# Altium PCB TG21_mach_nut_nhan _V1_ReV.PcbDoc (part 4 of 5)
Units mm, origin at the board's own origin, x right, y up, seen from the top; angles counter-clockwise.
Board outline 300 x 245 mm, 2 copper layers (Top Layer, Bottom Layer), stack 1.671 mm thick; 534 components, 407 nets, 1677 pads, 2608 vias.
Unrouted connection lines stored in the file: 3.
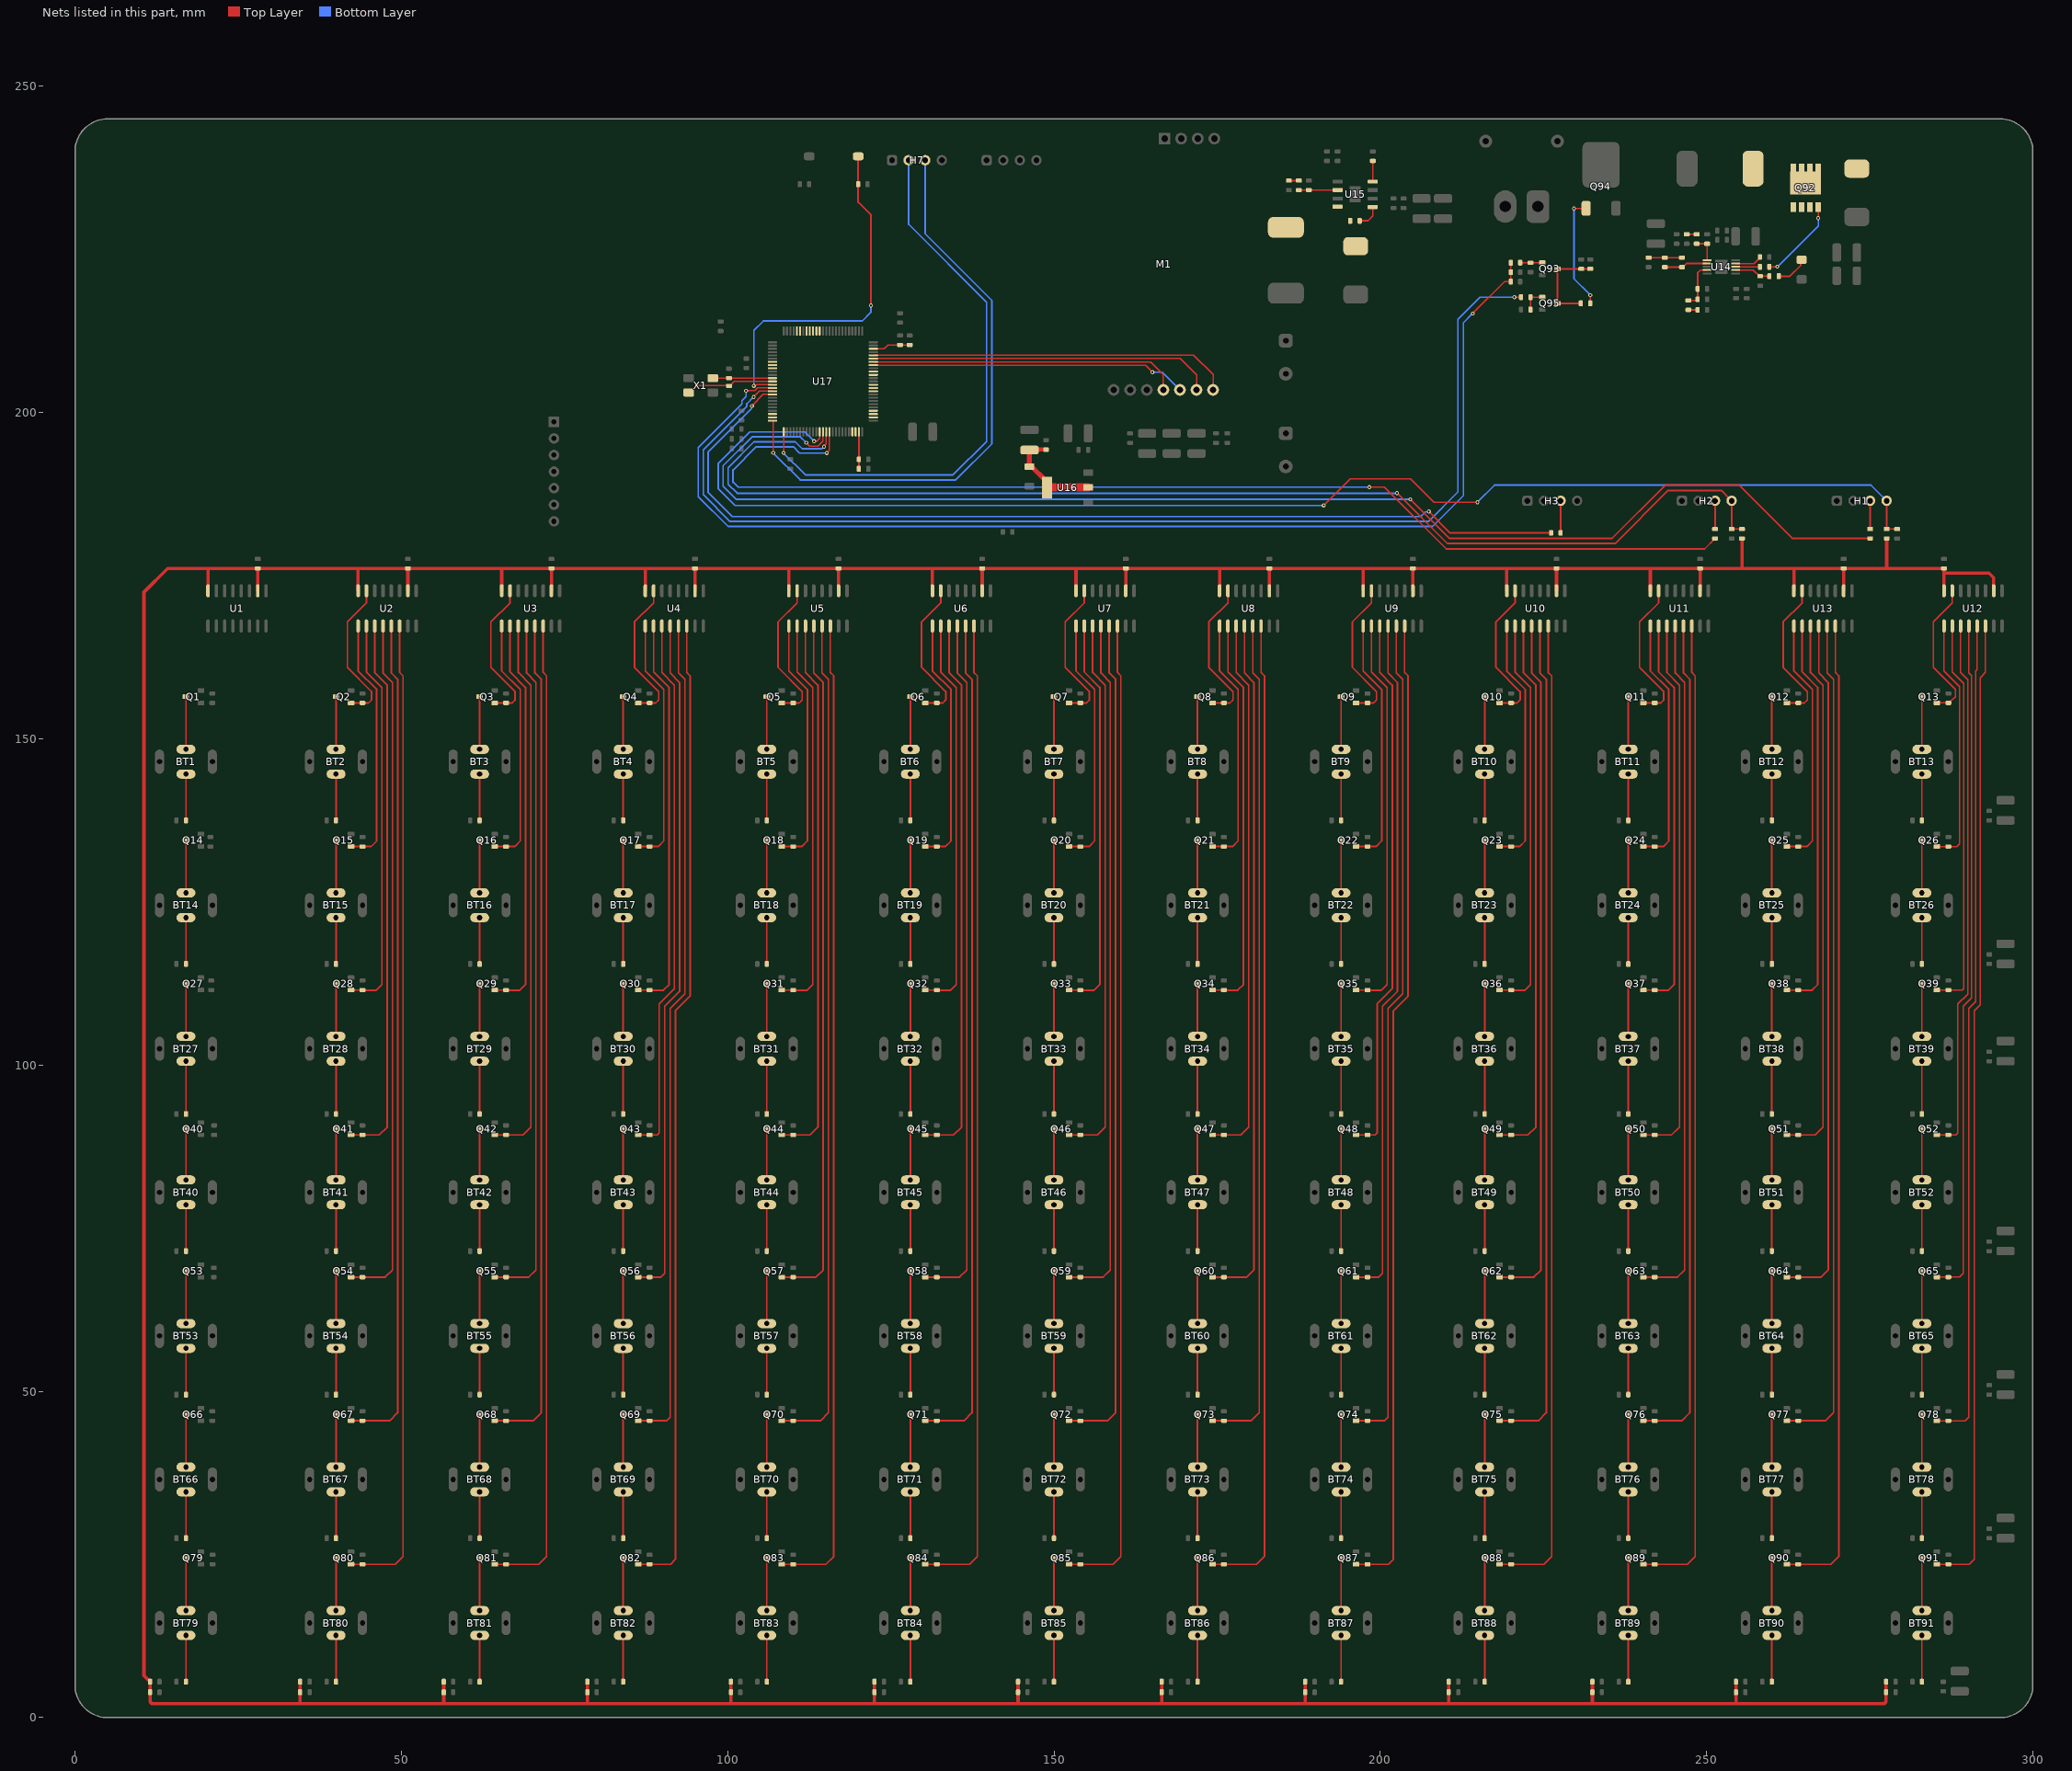
[diagram p4: the nets of this part, all layers, seen from the top]

## Via types
v1: diameter 0.6, hole 0.3, Top Layer to Bottom Layer, tented both sides, 2488 vias
v2: diameter 1.27, hole 0.711, Top Layer to Bottom Layer, tented both sides, 97 vias
v3: diameter 0.7, hole 0.3, Top Layer to Bottom Layer, tented both sides, 23 vias

## Nets (pads, with @x,y where several pads share a name; then routed paths per layer and width w, separated by ;. In a path a pad name is that pad's centre, name@x,y a point inside that pad or via, vN(x,y) a via of type N, cw(c..) or ccw(c..) an arc to the next point about the centre after c; other vN are vias at no path point) (continued)
L8: Q2.1 R15.2 U2.15 | length 24.6
  Top Layer w0.254: U2.15@44.655,172.699 44.655,170.846 41.727,167.919 41.727,160.953 45.436,157.244 45.436,155.949 44.987,155.5 R15.2@44.05,155.5 ; R15.2@44.05,155.5 Q2.1@42.3,155.5 R15.2@44.05,155.5
L9: Q15.1 R41.2 U2.1 | length 40.1
  Top Layer w0.254: U2.1@43.385,167.299 43.385,160.387 46.223,157.549 46.223,134.359 45.364,133.5 43.767,133.5 Q15.1@42.3,133.5 R41.2@44.05,133.5
L10: Q28.1 R67.2 U2.2 | length 62.8
  Top Layer w0.254: R67.2@44.05,111.5 Q28.1@42.3,111.5 43.869,111.5 43.895,111.473 46.172,111.473 47.036,112.337 47.036,157.879 44.655,160.26 U2.2@44.655,167.299
L11: Q41.1 R93.2 U2.3 | length 83.4
  Top Layer w0.254: Q41.1@42.3,89.3 R93.2@44.05,89.3 ; R93.2@44.326,89.3 46.63,89.3 47.849,90.518 47.849,158.235 45.925,160.159 U2.3@45.925,167.299
L12: Q54.1 R119.2 U2.4 | length 107.6
  Top Layer w0.254: R119.2@44.275,67.5 47.538,67.5 48.636,68.598 48.636,158.641 47.195,160.083 U2.4@47.195,167.299 ; Q54.1@42.3,67.5 R119.2@44.05,67.5 Q54.1@42.3,67.5
L13: Q67.1 R145.2 U2.5 | length 130.4
  Top Layer w0.254: U2.5@48.465,167.299 48.465,160.083 49.449,159.098 49.449,46.729 48.22,45.5 R145.2@44.05,45.5 ; R145.2@44.05,45.5 Q67.1@42.3,45.5 R145.2@44.05,45.5
L14: Q80.1 R171.2 U2.6 | length 153
  Top Layer w0.254: R171.2@44.072,23.5 49.055,23.5 50.262,24.707 50.262,159.657 49.735,160.184 U2.6@49.735,167.299 ; Q80.1@42.3,23.5 R171.2@44.05,23.5 Q80.1@42.3,23.5
L15: Q3.1 R16.2 U3.15 | length 24.6
  Top Layer w0.254: U3.15@66.655,172.699 66.655,170.846 63.727,167.919 63.727,160.953 67.436,157.244 67.436,155.949 66.987,155.5 R16.2@66.05,155.5 ; R16.2@66.05,155.5 Q3.1@64.3,155.5 R16.2@66.05,155.5
L16: Q16.1 R42.2 U3.1 | length 40.1
  Top Layer w0.254: U3.1@65.385,167.299 65.385,160.387 68.223,157.549 68.223,134.359 67.364,133.5 65.767,133.5 Q16.1@64.3,133.5 R42.2@66.05,133.5
L17: Q29.1 R68.2 U3.2 | length 62.8
  Top Layer w0.254: R68.2@66.05,111.5 Q29.1@64.3,111.5 65.869,111.5 65.895,111.473 68.172,111.473 69.036,112.337 69.036,157.879 66.655,160.26 U3.2@66.655,167.299
L18: Q42.1 R94.2 U3.3 | length 83.4
  Top Layer w0.254: Q42.1@64.3,89.3 R94.2@66.05,89.3 ; R94.2@66.326,89.3 68.63,89.3 69.849,90.518 69.849,158.235 67.925,160.159 U3.3@67.925,167.299
L19: Q55.1 R120.2 U3.4 | length 107.6
  Top Layer w0.254: R120.2@66.275,67.5 69.538,67.5 70.636,68.598 70.636,158.641 69.195,160.083 U3.4@69.195,167.299 ; Q55.1@64.3,67.5 R120.2@66.05,67.5 Q55.1@64.3,67.5
L20: Q68.1 R146.2 U3.5 | length 130.4
  Top Layer w0.254: U3.5@70.465,167.299 70.465,160.083 71.449,159.098 71.449,46.729 70.22,45.5 R146.2@66.05,45.5 ; R146.2@66.05,45.5 Q68.1@64.3,45.5 R146.2@66.05,45.5
L21: Q81.1 R172.2 U3.6 | length 153
  Top Layer w0.254: R172.2@66.072,23.5 71.055,23.5 72.262,24.707 72.262,159.657 71.735,160.184 U3.6@71.735,167.299 ; Q81.1@64.3,23.5 R172.2@66.05,23.5 Q81.1@64.3,23.5
L22: Q4.1 R17.2 U4.15 | length 24.6
  Top Layer w0.254: U4.15@88.655,172.699 88.655,170.846 85.727,167.919 85.727,160.953 89.436,157.244 89.436,155.949 88.987,155.5 R17.2@88.05,155.5 ; R17.2@88.05,155.5 Q4.1@86.3,155.5 R17.2@88.05,155.5
L23: Q17.1 R43.2 U4.1 | length 40.1
  Top Layer w0.254: U4.1@87.385,167.299 87.385,160.387 90.223,157.549 90.223,134.359 89.364,133.5 87.767,133.5 Q17.1@86.3,133.5 R43.2@88.05,133.5
L24: Q30.1 R69.2 U4.2 | length 62.8
  Top Layer w0.254: R69.2@88.05,111.5 Q30.1@86.3,111.5 87.869,111.5 87.895,111.473 90.172,111.473 91.036,112.337 91.036,157.879 88.655,160.26 U4.2@88.655,167.299
L25: Q43.1 R95.2 U4.3 | length 84.6
  Top Layer w0.254: U4.3@89.925,167.299 89.925,160.159 91.849,158.235 91.849,111.729 89.517,109.397 89.517,89.585 89.232,89.3 R95.2@88.05,89.3 ; R95.2@88.05,89.3 Q43.1@86.3,89.3 R95.2@88.05,89.3
L26: Q56.1 R121.2 U4.4 | length 104.8
  Top Layer w0.254: Q56.1@86.3,67.5 R121.2@88.05,67.5 ; R121.2@88.275,67.5 89.784,67.5 90.355,68.071 90.355,109.016 92.636,111.297 92.636,136.13 92.636,158.641 91.195,160.083 U4.4@91.195,167.299
L27: Q69.1 R147.2 U4.5 | length 127.7
  Top Layer w0.254: Q69.1@86.3,45.5 R147.2@88.05,45.5 90.644,45.5 91.193,46.049 91.193,108.685 93.449,110.941 93.449,131.006 93.449,159.098 92.465,160.083 U4.5@92.465,167.299
L28: Q82.1 R173.2 U4.6 | length 150.2
  Top Layer w0.254: Q82.1@86.3,23.5 R173.2@88.05,23.5 ; R173.2@88.072,23.5 91.25,23.5 92.006,24.256 92.006,108.33 94.262,110.586 94.262,125.92 94.262,159.657 93.735,160.184 U4.6@93.735,167.299
L29: Q5.1 R18.2 U5.15 | length 24.6
  Top Layer w0.254: U5.15@110.655,172.699 110.655,170.846 107.727,167.919 107.727,160.953 111.436,157.244 111.436,155.949 110.987,155.5 R18.2@110.05,155.5 ; R18.2@110.05,155.5 Q5.1@108.3,155.5 R18.2@110.05,155.5
L30: Q18.1 R44.2 U5.1 | length 40.1
  Top Layer w0.254: U5.1@109.385,167.299 109.385,160.387 112.223,157.549 112.223,134.359 111.364,133.5 109.767,133.5 Q18.1@108.3,133.5 R44.2@110.05,133.5
L31: Q31.1 R70.2 U5.2 | length 62.8
  Top Layer w0.254: R70.2@110.05,111.5 Q31.1@108.3,111.5 109.869,111.5 109.895,111.473 112.172,111.473 113.036,112.337 113.036,157.879 110.655,160.26 U5.2@110.655,167.299
L32: Q44.1 R96.2 U5.3 | length 83.4
  Top Layer w0.254: Q44.1@108.3,89.3 R96.2@110.05,89.3 ; R96.2@110.326,89.3 112.63,89.3 113.849,90.518 113.849,158.235 111.925,160.159 U5.3@111.925,167.299
L33: Q57.1 R122.2 U5.4 | length 107.6
  Top Layer w0.254: R122.2@110.275,67.5 113.538,67.5 114.636,68.598 114.636,158.641 113.195,160.083 U5.4@113.195,167.299 ; Q57.1@108.3,67.5 R122.2@110.05,67.5 Q57.1@108.3,67.5
L34: Q70.1 R148.2 U5.5 | length 130.4
  Top Layer w0.254: U5.5@114.465,167.299 114.465,160.083 115.449,159.098 115.449,46.729 114.22,45.5 R148.2@110.05,45.5 ; R148.2@110.05,45.5 Q70.1@108.3,45.5 R148.2@110.05,45.5
L35: Q83.1 R174.2 U5.6 | length 153
  Top Layer w0.254: R174.2@110.072,23.5 115.055,23.5 116.262,24.707 116.262,159.657 115.735,160.184 U5.6@115.735,167.299 ; Q83.1@108.3,23.5 R174.2@110.05,23.5 Q83.1@108.3,23.5
L36: Q6.1 R19.2 U6.15 | length 24.6
  Top Layer w0.254: U6.15@132.655,172.699 132.655,170.846 129.727,167.919 129.727,160.953 133.436,157.244 133.436,155.949 132.987,155.5 R19.2@132.05,155.5 ; R19.2@132.05,155.5 Q6.1@130.3,155.5 R19.2@132.05,155.5
L37: Q19.1 R45.2 U6.1 | length 40.1
  Top Layer w0.254: U6.1@131.385,167.299 131.385,160.387 134.223,157.549 134.223,134.359 133.364,133.5 131.767,133.5 Q19.1@130.3,133.5 R45.2@132.05,133.5
L38: Q32.1 R71.2 U6.2 | length 62.8
  Top Layer w0.254: R71.2@132.05,111.5 Q32.1@130.3,111.5 131.869,111.5 131.895,111.473 134.172,111.473 135.036,112.337 135.036,157.879 132.655,160.26 U6.2@132.655,167.299
L39: Q45.1 R97.2 U6.3 | length 83.4
  Top Layer w0.254: Q45.1@130.3,89.3 R97.2@132.05,89.3 ; R97.2@132.326,89.3 134.63,89.3 135.849,90.518 135.849,158.235 133.925,160.159 U6.3@133.925,167.299
L40: Q58.1 R123.2 U6.4 | length 107.6
  Top Layer w0.254: R123.2@132.275,67.5 135.538,67.5 136.636,68.598 136.636,158.641 135.195,160.083 U6.4@135.195,167.299 ; Q58.1@130.3,67.5 R123.2@132.05,67.5 Q58.1@130.3,67.5
L41: Q71.1 R149.2 U6.5 | length 130.4
  Top Layer w0.254: U6.5@136.465,167.299 136.465,160.083 137.449,159.098 137.449,46.729 136.22,45.5 R149.2@132.05,45.5 ; R149.2@132.05,45.5 Q71.1@130.3,45.5 R149.2@132.05,45.5
L42: Q84.1 R175.2 U6.6 | length 153
  Top Layer w0.254: R175.2@132.072,23.5 137.055,23.5 138.262,24.707 138.262,159.657 137.735,160.184 U6.6@137.735,167.299 ; Q84.1@130.3,23.5 R175.2@132.05,23.5 Q84.1@130.3,23.5
L43: Q7.1 R20.2 U7.15 | length 24.6
  Top Layer w0.254: U7.15@154.655,172.699 154.655,170.846 151.727,167.919 151.727,160.953 155.436,157.244 155.436,155.949 154.987,155.5 R20.2@154.05,155.5 ; R20.2@154.05,155.5 Q7.1@152.3,155.5 R20.2@154.05,155.5
L44: Q20.1 R46.2 U7.1 | length 40.1
  Top Layer w0.254: U7.1@153.385,167.299 153.385,160.387 156.223,157.549 156.223,134.359 155.364,133.5 153.767,133.5 Q20.1@152.3,133.5 R46.2@154.05,133.5
L45: Q33.1 R72.2 U7.2 | length 62.8
  Top Layer w0.254: R72.2@154.05,111.5 Q33.1@152.3,111.5 153.869,111.5 153.895,111.473 156.172,111.473 157.036,112.337 157.036,157.879 154.655,160.26 U7.2@154.655,167.299
L46: Q46.1 R98.2 U7.3 | length 83.4
  Top Layer w0.254: Q46.1@152.3,89.3 R98.2@154.05,89.3 ; R98.2@154.326,89.3 156.63,89.3 157.849,90.518 157.849,158.235 155.925,160.159 U7.3@155.925,167.299
L47: Q59.1 R124.2 U7.4 | length 107.6
  Top Layer w0.254: R124.2@154.275,67.5 157.538,67.5 158.636,68.598 158.636,158.641 157.195,160.083 U7.4@157.195,167.299 ; Q59.1@152.3,67.5 R124.2@154.05,67.5 Q59.1@152.3,67.5
L48: Q72.1 R150.2 U7.5 | length 130.4
  Top Layer w0.254: U7.5@158.465,167.299 158.465,160.083 159.449,159.098 159.449,46.729 158.22,45.5 R150.2@154.05,45.5 ; R150.2@154.05,45.5 Q72.1@152.3,45.5 R150.2@154.05,45.5
L49: Q85.1 R176.2 U7.6 | length 153
  Top Layer w0.254: R176.2@154.072,23.5 159.055,23.5 160.262,24.707 160.262,159.657 159.735,160.184 U7.6@159.735,167.299 ; Q85.1@152.3,23.5 R176.2@154.05,23.5 Q85.1@152.3,23.5
L50: Q8.1 R21.2 U8.15 | length 24.6
  Top Layer w0.254: U8.15@176.655,172.699 176.655,170.846 173.727,167.919 173.727,160.953 177.436,157.244 177.436,155.949 176.987,155.5 R21.2@176.05,155.5 ; R21.2@176.05,155.5 Q8.1@174.3,155.5 R21.2@176.05,155.5
L51: Q21.1 R47.2 U8.1 | length 40.1
  Top Layer w0.254: U8.1@175.385,167.299 175.385,160.387 178.223,157.549 178.223,134.359 177.364,133.5 175.767,133.5 Q21.1@174.3,133.5 R47.2@176.05,133.5
L52: Q34.1 R73.2 U8.2 | length 62.8
  Top Layer w0.254: R73.2@176.05,111.5 Q34.1@174.3,111.5 175.869,111.5 175.895,111.473 178.172,111.473 179.036,112.337 179.036,157.879 176.655,160.26 U8.2@176.655,167.299
L53: Q47.1 R99.2 U8.3 | length 83.4
  Top Layer w0.254: Q47.1@174.3,89.3 R99.2@176.05,89.3 ; R99.2@176.326,89.3 178.63,89.3 179.849,90.518 179.849,158.235 177.925,160.159 U8.3@177.925,167.299
L54: Q60.1 R125.2 U8.4 | length 107.6
  Top Layer w0.254: R125.2@176.275,67.5 179.538,67.5 180.636,68.598 180.636,158.641 179.195,160.083 U8.4@179.195,167.299 ; Q60.1@174.3,67.5 R125.2@176.05,67.5 Q60.1@174.3,67.5
L55: Q73.1 R151.2 U8.5 | length 130.4
  Top Layer w0.254: U8.5@180.465,167.299 180.465,160.083 181.449,159.098 181.449,46.729 180.22,45.5 R151.2@176.05,45.5 ; R151.2@176.05,45.5 Q73.1@174.3,45.5 R151.2@176.05,45.5
L56: Q86.1 R177.2 U8.6 | length 153
  Top Layer w0.254: R177.2@176.072,23.5 181.055,23.5 182.262,24.707 182.262,159.657 181.735,160.184 U8.6@181.735,167.299 ; Q86.1@174.3,23.5 R177.2@176.05,23.5 Q86.1@174.3,23.5
L57: Q9.1 R22.2 U9.15 | length 24.6
  Top Layer w0.254: U9.15@198.655,172.699 198.655,170.846 195.727,167.919 195.727,160.953 199.436,157.244 199.436,155.949 198.987,155.5 R22.2@198.05,155.5 ; R22.2@198.05,155.5 Q9.1@196.3,155.5 R22.2@198.05,155.5
L58: Q22.1 R48.2 U9.1 | length 40.1
  Top Layer w0.254: U9.1@197.385,167.299 197.385,160.387 200.223,157.549 200.223,134.359 199.364,133.5 197.767,133.5 Q22.1@196.3,133.5 R48.2@198.05,133.5
L59: Q35.1 R74.2 U9.2 | length 62.8
  Top Layer w0.254: R74.2@198.05,111.5 Q35.1@196.3,111.5 197.869,111.5 197.895,111.473 200.172,111.473 201.036,112.337 201.036,157.879 198.655,160.26 U9.2@198.655,167.299
L60: Q48.1 R100.2 U9.3 | length 84.6
  Top Layer w0.254: U9.3@199.925,167.299 199.925,160.159 201.849,158.235 201.849,111.729 199.517,109.397 199.517,89.585 199.232,89.3 R100.2@198.05,89.3 ; R100.2@198.05,89.3 Q48.1@196.3,89.3 R100.2@198.05,89.3
L61: Q61.1 R126.2 U9.4 | length 104.8
  Top Layer w0.254: Q61.1@196.3,67.5 R126.2@198.05,67.5 ; R126.2@198.275,67.5 199.784,67.5 200.355,68.071 200.355,109.016 202.636,111.297 202.636,136.13 202.636,158.641 201.195,160.083 U9.4@201.195,167.299
L62: Q74.1 R152.2 U9.5 | length 127.7
  Top Layer w0.254: Q74.1@196.3,45.5 R152.2@198.05,45.5 200.644,45.5 201.193,46.049 201.193,108.685 203.449,110.941 203.449,131.006 203.449,159.098 202.465,160.083 U9.5@202.465,167.299
L63: Q87.1 R178.2 U9.6 | length 150.2
  Top Layer w0.254: Q87.1@196.3,23.5 R178.2@198.05,23.5 ; R178.2@198.072,23.5 201.25,23.5 202.006,24.256 202.006,108.33 204.262,110.586 204.262,125.92 204.262,159.657 203.735,160.184 U9.6@203.735,167.299
L64: Q10.1 R23.2 U10.15 | length 24.6
  Top Layer w0.254: U10.15@220.655,172.699 220.655,170.846 217.727,167.919 217.727,160.953 221.436,157.244 221.436,155.949 220.987,155.5 R23.2@220.05,155.5 ; R23.2@220.05,155.5 Q10.1@218.3,155.5 R23.2@220.05,155.5
L65: Q23.1 R49.2 U10.1 | length 40.1
  Top Layer w0.254: U10.1@219.385,167.299 219.385,160.387 222.223,157.549 222.223,134.359 221.364,133.5 219.767,133.5 Q23.1@218.3,133.5 R49.2@220.05,133.5
L66: Q36.1 R75.2 U10.2 | length 62.8
  Top Layer w0.254: R75.2@220.05,111.5 Q36.1@218.3,111.5 219.869,111.5 219.895,111.473 222.172,111.473 223.036,112.337 223.036,157.879 220.655,160.26 U10.2@220.655,167.299
L67: Q49.1 R101.2 U10.3 | length 83.4
  Top Layer w0.254: Q49.1@218.3,89.3 R101.2@220.05,89.3 ; R101.2@220.326,89.3 222.63,89.3 223.849,90.518 223.849,158.235 221.925,160.159 U10.3@221.925,167.299
L68: Q62.1 R127.2 U10.4 | length 107.6
  Top Layer w0.254: R127.2@220.275,67.5 223.538,67.5 224.636,68.598 224.636,158.641 223.195,160.083 U10.4@223.195,167.299 ; Q62.1@218.3,67.5 R127.2@220.05,67.5 Q62.1@218.3,67.5
L69: Q75.1 R153.2 U10.5 | length 130.4
  Top Layer w0.254: U10.5@224.465,167.299 224.465,160.083 225.449,159.098 225.449,46.729 224.22,45.5 R153.2@220.05,45.5 ; R153.2@220.05,45.5 Q75.1@218.3,45.5 R153.2@220.05,45.5
L70: Q88.1 R179.2 U10.6 | length 153
  Top Layer w0.254: R179.2@220.072,23.5 225.055,23.5 226.262,24.707 226.262,159.657 225.735,160.184 U10.6@225.735,167.299 ; Q88.1@218.3,23.5 R179.2@220.05,23.5 Q88.1@218.3,23.5
L71: Q11.1 R24.2 U11.15 | length 24.6
  Top Layer w0.254: U11.15@242.655,172.699 242.655,170.846 239.727,167.919 239.727,160.953 243.436,157.244 243.436,155.949 242.987,155.5 R24.2@242.05,155.5 ; R24.2@242.05,155.5 Q11.1@240.3,155.5 R24.2@242.05,155.5
L72: Q24.1 R50.2 U11.1 | length 40.1
  Top Layer w0.254: U11.1@241.385,167.299 241.385,160.387 244.223,157.549 244.223,134.359 243.364,133.5 241.767,133.5 Q24.1@240.3,133.5 R50.2@242.05,133.5
L73: Q37.1 R76.2 U11.2 | length 62.8
  Top Layer w0.254: R76.2@242.05,111.5 Q37.1@240.3,111.5 241.869,111.5 241.895,111.473 244.172,111.473 245.036,112.337 245.036,157.879 242.655,160.26 U11.2@242.655,167.299
L74: Q50.1 R102.2 U11.3 | length 83.4
  Top Layer w0.254: Q50.1@240.3,89.3 R102.2@242.05,89.3 ; R102.2@242.326,89.3 244.63,89.3 245.849,90.518 245.849,158.235 243.925,160.159 U11.3@243.925,167.299
L75: Q63.1 R128.2 U11.4 | length 107.6
  Top Layer w0.254: R128.2@242.275,67.5 245.538,67.5 246.636,68.598 246.636,158.641 245.195,160.083 U11.4@245.195,167.299 ; Q63.1@240.3,67.5 R128.2@242.05,67.5 Q63.1@240.3,67.5
L76: Q76.1 R154.2 U11.5 | length 130.4
  Top Layer w0.254: U11.5@246.465,167.299 246.465,160.083 247.449,159.098 247.449,46.729 246.22,45.5 R154.2@242.05,45.5 ; R154.2@242.05,45.5 Q76.1@240.3,45.5 R154.2@242.05,45.5
L77: Q89.1 R180.2 U11.6 | length 153
  Top Layer w0.254: R180.2@242.072,23.5 247.055,23.5 248.262,24.707 248.262,159.657 247.735,160.184 U11.6@247.735,167.299 ; Q89.1@240.3,23.5 R180.2@242.05,23.5 Q89.1@240.3,23.5
L78: Q12.1 R25.2 U13.15 | length 24.6
  Top Layer w0.254: U13.15@264.655,172.699 264.655,170.846 261.727,167.919 261.727,160.953 265.436,157.244 265.436,155.949 264.987,155.5 R25.2@264.05,155.5 ; R25.2@264.05,155.5 Q12.1@262.3,155.5 R25.2@264.05,155.5
L79: Q25.1 R51.2 U13.1 | length 40.1
  Top Layer w0.254: U13.1@263.385,167.299 263.385,160.387 266.223,157.549 266.223,134.359 265.364,133.5 263.767,133.5 Q25.1@262.3,133.5 R51.2@264.05,133.5
L80: Q38.1 R77.2 U13.2 | length 62.8
  Top Layer w0.254: R77.2@264.05,111.5 Q38.1@262.3,111.5 263.869,111.5 263.895,111.473 266.172,111.473 267.036,112.337 267.036,157.879 264.655,160.26 U13.2@264.655,167.299
L81: Q51.1 R103.2 U13.3 | length 83.4
  Top Layer w0.254: Q51.1@262.3,89.3 R103.2@264.05,89.3 ; R103.2@264.326,89.3 266.63,89.3 267.849,90.518 267.849,158.235 265.925,160.159 U13.3@265.925,167.299
L82: Q64.1 R129.2 U13.4 | length 107.6
  Top Layer w0.254: R129.2@264.275,67.5 267.538,67.5 268.636,68.598 268.636,158.641 267.195,160.083 U13.4@267.195,167.299 ; Q64.1@262.3,67.5 R129.2@264.05,67.5 Q64.1@262.3,67.5
L83: Q77.1 R155.2 U13.5 | length 130.4
  Top Layer w0.254: U13.5@268.465,167.299 268.465,160.083 269.449,159.098 269.449,46.729 268.22,45.5 R155.2@264.05,45.5 ; R155.2@264.05,45.5 Q77.1@262.3,45.5 R155.2@264.05,45.5
L84: Q90.1 R181.2 U13.6 | length 153
  Top Layer w0.254: R181.2@264.072,23.5 269.055,23.5 270.262,24.707 270.262,159.657 269.735,160.184 U13.6@269.735,167.299 ; Q90.1@262.3,23.5 R181.2@264.05,23.5 Q90.1@262.3,23.5
L85: Q13.1 R26.2 U12.15 | length 22.1
  Top Layer w0.203: Q13.1@285.3,155.5 287.156,155.5 287.373,155.717 288.11,156.454 288.11,157.57 284.727,160.953 284.727,167.919 287.655,170.846 U12.15@287.655,172.699
L86: Q26.1 R52.2 U12.1 | length 39.5
  Top Layer w0.203: U12.1@286.385,167.299 286.385,160.387 288.771,158.001 288.771,133.906 288.364,133.5 R52.2@287.05,133.5 Q26.1@285.3,133.5 R52.2@286.767,133.5
L87: Q39.1 R78.2 U12.2 | length 62.1
  Top Layer w0.203: R78.2@286.869,111.5 Q39.1@285.3,111.5 R78.2@287.05,111.5 ; R78.2@287.05,111.473 289.172,111.473 289.406,111.707 289.406,158.509 287.655,160.26 U12.2@287.655,167.299
L88: Q52.1 R104.2 U12.3 | length 82.1
  Top Layer w0.203: Q52.1@285.3,89.3 R104.2@287.05,89.3 288.232,89.3 288.517,89.585 288.517,109.397 290.015,110.895 290.015,159.068 288.925,160.159 U12.3@288.925,167.299
L89: Q65.1 R130.2 U12.4 | length 104
  Top Layer w0.203: Q65.1@285.3,67.5 R130.2@287.05,67.5 ; R130.2@287.275,67.5 288.784,67.5 289.355,68.071 289.355,109.016 290.625,110.286 290.625,159.652 290.195,160.083 U12.4@290.195,167.299
L90: Q78.1 R156.2 U12.5 | length 126.9
  Top Layer w0.203: Q78.1@285.3,45.5 R156.2@287.05,45.5 289.644,45.5 290.193,46.049 290.193,108.685 291.26,109.752 291.26,160.422 291.465,160.627 U12.5@291.465,167.299
L91: Q91.1 R182.2 U12.6 | length 149.8
  Top Layer w0.203: Q91.1@285.3,23.5 R182.2@287.05,23.5 ; R182.2@287.072,23.5 290.25,23.5 291.006,24.256 291.006,108.33 291.92,109.244 291.92,159.37 292.735,160.184 U12.6@292.735,167.299
LED_PW: R200.1 U17.17 | length 152.3
  Top Layer w0.178: v1(103.734,201.016) 103.734,201.041 105.467,202.775 U17.17@106.88,202.775
  Top Layer w0.254: v1(207.442,184.846) 210.728,181.559 R200.1@226.185,181.559
  Bottom Layer w0.254: v1(103.734,201.016) 103.667,200.949 103.667,200.629 97.028,193.99 97.028,187.753 100.545,184.236 100.707,184.074 206.208,184.074 206.37,184.236 206.914,184.78 207.376,184.78 v1(207.442,184.846)
LED_SET: R197.1 U17.38 | length 208.4
  Top Layer w0.178: v1(112.065,195.377) 112.573,194.869 113.843,194.869 114.605,195.631 U17.38@114.605,197.05
  Top Layer w0.254: v1(204.597,186.715) 210.584,180.728 235.541,180.728 243.688,188.874 254.991,188.874 263.164,180.701 R197.1@275.063,180.701
  Bottom Layer w0.254: v1(112.065,195.377) 111.165,196.277 103.734,196.277 99.314,191.857 99.314,188.7 101.299,186.715 v1(204.597,186.715)
LED_STOP: R199.1 U17.40 | length 176.9
  Top Layer w0.178: v1(115.189,193.802) 115.214,193.802 115.605,194.192 U17.40@115.605,197.05
  Top Layer w0.254: v1(198.323,188.565) 200.639,188.565 210.109,179.095 249.702,179.095 R199.1@251.308,180.701
  Bottom Layer w0.254: v1(115.189,193.802) 111.013,193.802 110.062,194.753 104.379,194.753 100.838,191.211 100.838,189.334 101.608,188.565 v1(198.323,188.565)
M0.1: M1.1 U17.71 | length 55.6
  Top Layer w0.178: U17.71@122.33,208.775 171.412,208.775 174.384,205.803 M1.1@174.384,203.486
M0.2: U17.53
M1.1: M1.2 U17.70 | length 52.8
  Top Layer w0.178: U17.70@122.33,208.275 169.322,208.275 171.844,205.752 M1.2@171.844,203.486
M1.2: U17.52
MCU_BT: R215.2 R216.2 R217.2 U17.15 | length 183.7
  Top Layer w0.178: v1(102.819,203.352) 104.186,203.352 104.608,203.775 U17.15@106.88,203.775
  Top Layer w0.254: v1(214.173,215.189) 219.049,220.065 R215.2@219.989,220.065 ; R215.2@219.989,220.171 R217.2@219.989,221.519 R216.2@219.989,222.969
  Bottom Layer w0.254: v1(102.819,203.352) 102.819,202.474 102.184,201.839 102.184,201.301 95.504,194.621 95.504,187.122 100.076,182.55 208.026,182.55 212.75,187.274 212.75,213.766 v1(214.173,215.189)
MCU_EN: R221.2 U17.16 | length 178.2
  Top Layer w0.178: v1(103.974,202.387) 104.862,203.275 U17.16@106.88,203.275
  Top Layer w0.254: v1(220.548,217.678) 220.553,217.683 221.57,217.683 R221.2@221.575,217.688
  Bottom Layer w0.254: v1(103.974,202.387) 102.946,201.359 102.946,200.986 96.266,194.305 96.266,187.437 100.392,183.312 207.366,183.312 211.887,187.833 211.887,214.3 215.265,217.678 v1(220.548,217.678)
NetBT1_3: BT1.3 R1.2 | length 7.1
  Top Layer w0.254: R1.2@17,137.5 BT1.3@17,144.6
NetBT1_4: BT1.4 Q1.3 | length 8.1
  Top Layer w0.254: BT1.4@17,148.4 Q1.3@17,156.45
NetBT2_3: BT2.3 R2.2 | length 7.1
  Top Layer w0.254: R2.2@40,137.5 BT2.3@40,144.6
NetBT2_4: BT2.4 Q2.3 | length 8.1
  Top Layer w0.254: BT2.4@40,148.4 Q2.3@40,156.45
NetBT3_3: BT3.3 R3.2 | length 7.1
  Top Layer w0.254: R3.2@62,137.5 BT3.3@62,144.6
NetBT3_4: BT3.4 Q3.3 | length 8.1
  Top Layer w0.254: BT3.4@62,148.4 Q3.3@62,156.45
NetBT4_3: BT4.3 R4.2 | length 7.1
  Top Layer w0.254: R4.2@84,137.5 BT4.3@84,144.6
NetBT4_4: BT4.4 Q4.3 | length 8.1
  Top Layer w0.254: BT4.4@84,148.4 Q4.3@84,156.45
NetBT5_3: BT5.3 R5.2 | length 7.1
  Top Layer w0.254: R5.2@106,137.5 BT5.3@106,144.6
NetBT5_4: BT5.4 Q5.3 | length 8.1
  Top Layer w0.254: BT5.4@106,148.4 Q5.3@106,156.45
NetBT6_3: BT6.3 R6.2 | length 7.1
  Top Layer w0.254: R6.2@128,137.5 BT6.3@128,144.6
NetBT6_4: BT6.4 Q6.3 | length 8.1
  Top Layer w0.254: BT6.4@128,148.4 Q6.3@128,156.45
NetBT7_3: BT7.3 R7.2 | length 7.1
  Top Layer w0.254: R7.2@150,137.5 BT7.3@150,144.6
NetBT7_4: BT7.4 Q7.3 | length 8.1
  Top Layer w0.254: BT7.4@150,148.4 Q7.3@150,156.45
NetBT8_3: BT8.3 R8.2 | length 7.1
  Top Layer w0.254: R8.2@172,137.5 BT8.3@172,144.6
NetBT8_4: BT8.4 Q8.3 | length 8.1
  Top Layer w0.254: BT8.4@172,148.4 Q8.3@172,156.45
NetBT9_3: BT9.3 R9.2 | length 7.1
  Top Layer w0.254: R9.2@194,137.5 BT9.3@194,144.6
NetBT9_4: BT9.4 Q9.3 | length 8.1
  Top Layer w0.254: BT9.4@194,148.4 Q9.3@194,156.45
NetBT10_3: BT10.3 R10.2 | length 7.1
  Top Layer w0.254: R10.2@216,137.5 BT10.3@216,144.6
NetBT10_4: BT10.4 Q10.3 | length 8.1
  Top Layer w0.254: BT10.4@216,148.4 Q10.3@216,156.45
NetBT11_3: BT11.3 R11.2 | length 7.1
  Top Layer w0.254: R11.2@238,137.5 BT11.3@238,144.6
NetBT11_4: BT11.4 Q11.3 | length 8.1
  Top Layer w0.254: BT11.4@238,148.4 Q11.3@238,156.45
NetBT12_3: BT12.3 R12.2 | length 7.1
  Top Layer w0.254: R12.2@260,137.5 BT12.3@260,144.6
NetBT12_4: BT12.4 Q12.3 | length 8.1
  Top Layer w0.254: BT12.4@260,148.4 Q12.3@260,156.45
NetBT13_3: BT13.3 R13.2 | length 7.1
  Top Layer w0.254: R13.2@283,137.5 BT13.3@283,144.6
NetBT13_4: BT13.4 Q13.3 | length 8.1
  Top Layer w0.254: BT13.4@283,148.4 Q13.3@283,156.45
NetBT14_3: BT14.3 R27.2 | length 7.1
  Top Layer w0.254: R27.2@17,115.5 BT14.3@17,122.6
NetBT14_4: BT14.4 Q14.3 | length 8.1
  Top Layer w0.254: BT14.4@17,126.4 Q14.3@17,134.45
NetBT15_3: BT15.3 R28.2 | length 7.1
  Top Layer w0.254: R28.2@40,115.5 BT15.3@40,122.6
NetBT15_4: BT15.4 Q15.3 | length 8.1
  Top Layer w0.254: BT15.4@40,126.4 Q15.3@40,134.45
NetBT16_3: BT16.3 R29.2 | length 7.1
  Top Layer w0.254: R29.2@62,115.5 BT16.3@62,122.6
NetBT16_4: BT16.4 Q16.3 | length 8.1
  Top Layer w0.254: BT16.4@62,126.4 Q16.3@62,134.45
NetBT17_3: BT17.3 R30.2 | length 7.1
  Top Layer w0.254: R30.2@84,115.5 BT17.3@84,122.6
NetBT17_4: BT17.4 Q17.3 | length 8.1
  Top Layer w0.254: BT17.4@84,126.4 Q17.3@84,134.45
NetBT18_3: BT18.3 R31.2 | length 7.1
  Top Layer w0.254: R31.2@106,115.5 BT18.3@106,122.6
NetBT18_4: BT18.4 Q18.3 | length 8.1
  Top Layer w0.254: BT18.4@106,126.4 Q18.3@106,134.45
NetBT19_3: BT19.3 R32.2 | length 7.1
  Top Layer w0.254: R32.2@128,115.5 BT19.3@128,122.6
NetBT19_4: BT19.4 Q19.3 | length 8.1
  Top Layer w0.254: BT19.4@128,126.4 Q19.3@128,134.45
NetBT20_3: BT20.3 R33.2 | length 7.1
  Top Layer w0.254: R33.2@150,115.5 BT20.3@150,122.6
NetBT20_4: BT20.4 Q20.3 | length 8.1
  Top Layer w0.254: BT20.4@150,126.4 Q20.3@150,134.45
NetBT21_3: BT21.3 R34.2 | length 7.1
  Top Layer w0.254: R34.2@172,115.5 BT21.3@172,122.6
NetBT21_4: BT21.4 Q21.3 | length 8.1
  Top Layer w0.254: BT21.4@172,126.4 Q21.3@172,134.45
NetBT22_3: BT22.3 R35.2 | length 7.1
  Top Layer w0.254: R35.2@194,115.5 BT22.3@194,122.6
NetBT22_4: BT22.4 Q22.3 | length 8.1
  Top Layer w0.254: BT22.4@194,126.4 Q22.3@194,134.45
NetBT23_3: BT23.3 R36.2 | length 7.1
  Top Layer w0.254: R36.2@216,115.5 BT23.3@216,122.6
NetBT23_4: BT23.4 Q23.3 | length 8.1
  Top Layer w0.254: BT23.4@216,126.4 Q23.3@216,134.45
NetBT24_3: BT24.3 R37.2 | length 7.1
  Top Layer w0.254: R37.2@238,115.5 BT24.3@238,122.6
NetBT24_4: BT24.4 Q24.3 | length 8.1
  Top Layer w0.254: BT24.4@238,126.4 Q24.3@238,134.45
NetBT25_3: BT25.3 R38.2 | length 7.1
  Top Layer w0.254: R38.2@260,115.5 BT25.3@260,122.6
NetBT25_4: BT25.4 Q25.3 | length 8.1
  Top Layer w0.254: BT25.4@260,126.4 Q25.3@260,134.45
NetBT26_3: BT26.3 R39.2 | length 7.1
  Top Layer w0.254: R39.2@283,115.5 BT26.3@283,122.6
NetBT26_4: BT26.4 Q26.3 | length 8.1
  Top Layer w0.254: BT26.4@283,126.4 Q26.3@283,134.45
NetBT27_3: BT27.3 R53.2 | length 8.1
  Top Layer w0.254: R53.2@17,92.503 BT27.3@17,100.6
NetBT27_4: BT27.4 Q27.3 | length 8.1
  Top Layer w0.254: BT27.4@17,104.4 Q27.3@17,112.45
NetBT28_3: BT28.3 R54.2 | length 8.1
  Top Layer w0.254: R54.2@40,92.503 BT28.3@40,100.6
NetBT28_4: BT28.4 Q28.3 | length 8.1
  Top Layer w0.254: BT28.4@40,104.4 Q28.3@40,112.45
NetBT29_3: BT29.3 R55.2 | length 8.1
  Top Layer w0.254: R55.2@62,92.503 BT29.3@62,100.6
NetBT29_4: BT29.4 Q29.3 | length 8.1
  Top Layer w0.254: BT29.4@62,104.4 Q29.3@62,112.45
NetBT30_3: BT30.3 R56.2 | length 8.1
  Top Layer w0.254: R56.2@84,92.503 BT30.3@84,100.6
NetBT30_4: BT30.4 Q30.3 | length 8.1
  Top Layer w0.254: BT30.4@84,104.4 Q30.3@84,112.45
NetBT31_3: BT31.3 R57.2 | length 8.1
  Top Layer w0.254: R57.2@106,92.503 BT31.3@106,100.6
NetBT31_4: BT31.4 Q31.3 | length 8.1
  Top Layer w0.254: BT31.4@106,104.4 Q31.3@106,112.45
NetBT32_3: BT32.3 R58.2 | length 8.1
  Top Layer w0.254: R58.2@128,92.503 BT32.3@128,100.6
NetBT32_4: BT32.4 Q32.3 | length 8.1
  Top Layer w0.254: BT32.4@128,104.4 Q32.3@128,112.45
NetBT33_3: BT33.3 R59.2 | length 8.1
  Top Layer w0.254: R59.2@150,92.503 BT33.3@150,100.6
NetBT33_4: BT33.4 Q33.3 | length 8.1
  Top Layer w0.254: BT33.4@150,104.4 Q33.3@150,112.45
NetBT34_3: BT34.3 R60.2 | length 8.1
  Top Layer w0.254: R60.2@172,92.503 BT34.3@172,100.6
NetBT34_4: BT34.4 Q34.3 | length 8.1
  Top Layer w0.254: BT34.4@172,104.4 Q34.3@172,112.45
NetBT35_3: BT35.3 R61.2 | length 8.1
  Top Layer w0.254: R61.2@194,92.503 BT35.3@194,100.6
NetBT35_4: BT35.4 Q35.3 | length 8.1
  Top Layer w0.254: BT35.4@194,104.4 Q35.3@194,112.45
NetBT36_3: BT36.3 R62.2 | length 8.1
  Top Layer w0.254: R62.2@216,92.503 BT36.3@216,100.6
NetBT36_4: BT36.4 Q36.3 | length 8.1
  Top Layer w0.254: BT36.4@216,104.4 Q36.3@216,112.45
NetBT37_3: BT37.3 R63.2 | length 8.1
  Top Layer w0.254: R63.2@238,92.503 BT37.3@238,100.6
NetBT37_4: BT37.4 Q37.3 | length 8.1
  Top Layer w0.254: BT37.4@238,104.4 Q37.3@238,112.45
NetBT38_3: BT38.3 R64.2 | length 8.1
  Top Layer w0.254: R64.2@260,92.503 BT38.3@260,100.6
NetBT38_4: BT38.4 Q38.3 | length 8.1
  Top Layer w0.254: BT38.4@260,104.4 Q38.3@260,112.45
NetBT39_3: BT39.3 R65.2 | length 8.1
  Top Layer w0.254: R65.2@283,92.503 BT39.3@283,100.6
NetBT39_4: BT39.4 Q39.3 | length 8.1
  Top Layer w0.254: BT39.4@283,104.4 Q39.3@283,112.45
NetBT40_3: BT40.3 R79.2 | length 7.1
  Top Layer w0.254: R79.2@17,71.5 BT40.3@17,78.6
NetBT40_4: BT40.4 Q40.3 | length 7.9
  Top Layer w0.254: BT40.4@17,82.4 Q40.3@17,90.25
NetBT41_3: BT41.3 R80.2 | length 7.1
  Top Layer w0.254: R80.2@40,71.5 BT41.3@40,78.6
NetBT41_4: BT41.4 Q41.3 | length 7.9
  Top Layer w0.254: BT41.4@40,82.4 Q41.3@40,90.25
NetBT42_3: BT42.3 R81.2 | length 7.1
  Top Layer w0.254: R81.2@62,71.5 BT42.3@62,78.6
NetBT42_4: BT42.4 Q42.3 | length 7.9
  Top Layer w0.254: BT42.4@62,82.4 Q42.3@62,90.25
NetBT43_3: BT43.3 R82.2 | length 7.1
  Top Layer w0.254: R82.2@84,71.5 BT43.3@84,78.6
NetBT43_4: BT43.4 Q43.3 | length 7.9
  Top Layer w0.254: BT43.4@84,82.4 Q43.3@84,90.25
NetBT44_3: BT44.3 R83.2 | length 7.1
  Top Layer w0.254: R83.2@106,71.5 BT44.3@106,78.6
NetBT44_4: BT44.4 Q44.3 | length 7.9
  Top Layer w0.254: BT44.4@106,82.4 Q44.3@106,90.25
NetBT45_3: BT45.3 R84.2 | length 7.1
  Top Layer w0.254: R84.2@128,71.5 BT45.3@128,78.6
NetBT45_4: BT45.4 Q45.3 | length 7.9
  Top Layer w0.254: BT45.4@128,82.4 Q45.3@128,90.25
NetBT46_3: BT46.3 R85.2 | length 7.1
  Top Layer w0.254: R85.2@150,71.5 BT46.3@150,78.6
NetBT46_4: BT46.4 Q46.3 | length 7.9
  Top Layer w0.254: BT46.4@150,82.4 Q46.3@150,90.25
NetBT47_3: BT47.3 R86.2 | length 7.1
  Top Layer w0.254: R86.2@172,71.5 BT47.3@172,78.6
NetBT47_4: BT47.4 Q47.3 | length 7.9
  Top Layer w0.254: BT47.4@172,82.4 Q47.3@172,90.25
NetBT48_3: BT48.3 R87.2 | length 7.1
  Top Layer w0.254: R87.2@194,71.5 BT48.3@194,78.6
NetBT48_4: BT48.4 Q48.3 | length 7.9
  Top Layer w0.254: BT48.4@194,82.4 Q48.3@194,90.25
NetBT49_3: BT49.3 R88.2 | length 7.1
  Top Layer w0.254: R88.2@216,71.5 BT49.3@216,78.6
NetBT49_4: BT49.4 Q49.3 | length 7.9
  Top Layer w0.254: BT49.4@216,82.4 Q49.3@216,90.25
NetBT50_3: BT50.3 R89.2 | length 7.1
  Top Layer w0.254: R89.2@238,71.5 BT50.3@238,78.6
NetBT50_4: BT50.4 Q50.3 | length 7.9
  Top Layer w0.254: BT50.4@238,82.4 Q50.3@238,90.25
NetBT51_3: BT51.3 R90.2 | length 7.1
  Top Layer w0.254: R90.2@260,71.5 BT51.3@260,78.6
NetBT51_4: BT51.4 Q51.3 | length 7.9
  Top Layer w0.254: BT51.4@260,82.4 Q51.3@260,90.25
NetBT52_3: BT52.3 R91.2 | length 7.1
  Top Layer w0.254: R91.2@283,71.5 BT52.3@283,78.6
NetBT52_4: BT52.4 Q52.3 | length 7.9
  Top Layer w0.254: BT52.4@283,82.4 Q52.3@283,90.25
NetBT53_3: BT53.3 R105.2 | length 7.1
  Top Layer w0.254: R105.2@17,49.5 BT53.3@17,56.6
NetBT53_4: BT53.4 Q53.3 | length 8.1
  Top Layer w0.254: BT53.4@17,60.4 Q53.3@17,68.45
NetBT54_3: BT54.3 R106.2 | length 7.1
  Top Layer w0.254: R106.2@40,49.5 BT54.3@40,56.6
NetBT54_4: BT54.4 Q54.3 | length 8.1
  Top Layer w0.254: BT54.4@40,60.4 Q54.3@40,68.45
NetBT55_3: BT55.3 R107.2 | length 7.1
  Top Layer w0.254: R107.2@62,49.5 BT55.3@62,56.6
NetBT55_4: BT55.4 Q55.3 | length 8.1
  Top Layer w0.254: BT55.4@62,60.4 Q55.3@62,68.45
NetBT56_3: BT56.3 R108.2 | length 7.1
  Top Layer w0.254: R108.2@84,49.5 BT56.3@84,56.6
NetBT56_4: BT56.4 Q56.3 | length 8.1
  Top Layer w0.254: BT56.4@84,60.4 Q56.3@84,68.45
NetBT57_3: BT57.3 R109.2 | length 7.1
  Top Layer w0.254: R109.2@106,49.5 BT57.3@106,56.6
NetBT57_4: BT57.4 Q57.3 | length 8.1
  Top Layer w0.254: BT57.4@106,60.4 Q57.3@106,68.45
NetBT58_3: BT58.3 R110.2 | length 7.1
  Top Layer w0.254: R110.2@128,49.5 BT58.3@128,56.6
NetBT58_4: BT58.4 Q58.3 | length 8.1
  Top Layer w0.254: BT58.4@128,60.4 Q58.3@128,68.45
NetBT59_3: BT59.3 R111.2 | length 7.1
  Top Layer w0.254: R111.2@150,49.5 BT59.3@150,56.6
NetBT59_4: BT59.4 Q59.3 | length 8.1
  Top Layer w0.254: BT59.4@150,60.4 Q59.3@150,68.45
NetBT60_3: BT60.3 R112.2 | length 7.1
  Top Layer w0.254: R112.2@172,49.5 BT60.3@172,56.6
NetBT60_4: BT60.4 Q60.3 | length 8.1
  Top Layer w0.254: BT60.4@172,60.4 Q60.3@172,68.45
NetBT61_3: BT61.3 R113.2 | length 7.1
  Top Layer w0.254: R113.2@194,49.5 BT61.3@194,56.6
NetBT61_4: BT61.4 Q61.3 | length 8.1
  Top Layer w0.254: BT61.4@194,60.4 Q61.3@194,68.45
NetBT62_3: BT62.3 R114.2 | length 7.1
  Top Layer w0.254: R114.2@216,49.5 BT62.3@216,56.6
NetBT62_4: BT62.4 Q62.3 | length 8.1
  Top Layer w0.254: BT62.4@216,60.4 Q62.3@216,68.45
NetBT63_3: BT63.3 R115.2 | length 7.1
  Top Layer w0.254: R115.2@238,49.5 BT63.3@238,56.6
NetBT63_4: BT63.4 Q63.3 | length 8.1
  Top Layer w0.254: BT63.4@238,60.4 Q63.3@238,68.45
NetBT64_3: BT64.3 R116.2 | length 7.1
  Top Layer w0.254: R116.2@260,49.5 BT64.3@260,56.6
NetBT64_4: BT64.4 Q64.3 | length 8.1
  Top Layer w0.254: BT64.4@260,60.4 Q64.3@260,68.45
NetBT65_3: BT65.3 R117.2 | length 7.1
  Top Layer w0.254: R117.2@283,49.5 BT65.3@283,56.6
NetBT65_4: BT65.4 Q65.3 | length 8.1
  Top Layer w0.254: BT65.4@283,60.4 Q65.3@283,68.45
NetBT66_3: BT66.3 R131.2 | length 7.1
  Top Layer w0.254: R131.2@17,27.5 BT66.3@17,34.6
NetBT66_4: BT66.4 Q66.3 | length 8.1
  Top Layer w0.254: BT66.4@17,38.4 Q66.3@17,46.45
NetBT67_3: BT67.3 R132.2 | length 7.1
  Top Layer w0.254: R132.2@40,27.5 BT67.3@40,34.6
NetBT67_4: BT67.4 Q67.3 | length 8.1
  Top Layer w0.254: BT67.4@40,38.4 Q67.3@40,46.45
NetBT68_3: BT68.3 R133.2 | length 7.1
  Top Layer w0.254: R133.2@62,27.5 BT68.3@62,34.6
NetBT68_4: BT68.4 Q68.3 | length 8.1
  Top Layer w0.254: BT68.4@62,38.4 Q68.3@62,46.45
NetBT69_3: BT69.3 R134.2 | length 7.1
  Top Layer w0.254: R134.2@84,27.5 BT69.3@84,34.6
NetBT69_4: BT69.4 Q69.3 | length 8.1
  Top Layer w0.254: BT69.4@84,38.4 Q69.3@84,46.45
NetBT70_3: BT70.3 R135.2 | length 7.1
  Top Layer w0.254: R135.2@106,27.5 BT70.3@106,34.6
NetBT70_4: BT70.4 Q70.3 | length 8.1
  Top Layer w0.254: BT70.4@106,38.4 Q70.3@106,46.45
NetBT71_3: BT71.3 R136.2 | length 7.1
  Top Layer w0.254: R136.2@128,27.5 BT71.3@128,34.6
NetBT71_4: BT71.4 Q71.3 | length 8.1
  Top Layer w0.254: BT71.4@128,38.4 Q71.3@128,46.45
NetBT72_3: BT72.3 R137.2 | length 7.1
  Top Layer w0.254: R137.2@150,27.5 BT72.3@150,34.6
NetBT72_4: BT72.4 Q72.3 | length 8.1
  Top Layer w0.254: BT72.4@150,38.4 Q72.3@150,46.45
NetBT73_3: BT73.3 R138.2 | length 7.1
  Top Layer w0.254: R138.2@172,27.5 BT73.3@172,34.6
NetBT73_4: BT73.4 Q73.3 | length 8.1
  Top Layer w0.254: BT73.4@172,38.4 Q73.3@172,46.45
NetBT74_3: BT74.3 R139.2 | length 7.1
  Top Layer w0.254: R139.2@194,27.5 BT74.3@194,34.6
NetBT74_4: BT74.4 Q74.3 | length 8.1
  Top Layer w0.254: BT74.4@194,38.4 Q74.3@194,46.45
NetBT75_3: BT75.3 R140.2 | length 7.1
  Top Layer w0.254: R140.2@216,27.5 BT75.3@216,34.6
NetBT75_4: BT75.4 Q75.3 | length 8.1
  Top Layer w0.254: BT75.4@216,38.4 Q75.3@216,46.45
NetBT76_3: BT76.3 R141.2 | length 7.1
  Top Layer w0.254: R141.2@238,27.5 BT76.3@238,34.6
NetBT76_4: BT76.4 Q76.3 | length 8.1
  Top Layer w0.254: BT76.4@238,38.4 Q76.3@238,46.45
NetBT77_3: BT77.3 R142.2 | length 7.1
  Top Layer w0.254: R142.2@260,27.5 BT77.3@260,34.6
NetBT77_4: BT77.4 Q77.3 | length 8.1
  Top Layer w0.254: BT77.4@260,38.4 Q77.3@260,46.45
NetBT78_3: BT78.3 R143.2 | length 7.1
  Top Layer w0.254: R143.2@283,27.5 BT78.3@283,34.6
NetBT78_4: BT78.4 Q78.3 | length 8.1
  Top Layer w0.254: BT78.4@283,38.4 Q78.3@283,46.45
NetBT79_3: BT79.3 R157.2 | length 7.1
  Top Layer w0.254: R157.2@17,5.5 BT79.3@17,12.6
NetBT79_4: BT79.4 Q79.3 | length 8.1
  Top Layer w0.254: BT79.4@17,16.4 Q79.3@17,24.45
NetBT80_3: BT80.3 R158.2 | length 7.1
  Top Layer w0.254: R158.2@40,5.5 BT80.3@40,12.6
NetBT80_4: BT80.4 Q80.3 | length 8.1
  Top Layer w0.254: BT80.4@40,16.4 Q80.3@40,24.45
NetBT81_3: BT81.3 R159.2 | length 7.1
  Top Layer w0.254: R159.2@62,5.5 BT81.3@62,12.6
NetBT81_4: BT81.4 Q81.3 | length 8.1
  Top Layer w0.254: BT81.4@62,16.4 Q81.3@62,24.45
NetBT82_3: BT82.3 R160.2 | length 7.1
  Top Layer w0.254: R160.2@84,5.5 BT82.3@84,12.6
NetBT82_4: BT82.4 Q82.3 | length 8.1
  Top Layer w0.254: BT82.4@84,16.4 Q82.3@84,24.45
NetBT83_3: BT83.3 R161.2 | length 7.1
  Top Layer w0.254: R161.2@106,5.5 BT83.3@106,12.6
NetBT83_4: BT83.4 Q83.3 | length 8.1
  Top Layer w0.254: BT83.4@106,16.4 Q83.3@106,24.45
NetBT84_3: BT84.3 R162.2 | length 7.1
  Top Layer w0.254: R162.2@128,5.5 BT84.3@128,12.6
NetBT84_4: BT84.4 Q84.3 | length 8.1
  Top Layer w0.254: BT84.4@128,16.4 Q84.3@128,24.45
NetBT85_3: BT85.3 R163.2 | length 7.1
  Top Layer w0.254: R163.2@150,5.5 BT85.3@150,12.6
NetBT85_4: BT85.4 Q85.3 | length 8.1
  Top Layer w0.254: BT85.4@150,16.4 Q85.3@150,24.45
NetBT86_3: BT86.3 R164.2 | length 7.1
  Top Layer w0.254: R164.2@172,5.5 BT86.3@172,12.6
NetBT86_4: BT86.4 Q86.3 | length 8.1
  Top Layer w0.254: BT86.4@172,16.4 Q86.3@172,24.45
NetBT87_3: BT87.3 R165.2 | length 7.1
  Top Layer w0.254: R165.2@194,5.5 BT87.3@194,12.6
NetBT87_4: BT87.4 Q87.3 | length 8.1
  Top Layer w0.254: BT87.4@194,16.4 Q87.3@194,24.45
NetBT88_3: BT88.3 R166.2 | length 7.1
  Top Layer w0.254: R166.2@216,5.5 BT88.3@216,12.6
NetBT88_4: BT88.4 Q88.3 | length 8.1
  Top Layer w0.254: BT88.4@216,16.4 Q88.3@216,24.45
NetBT89_3: BT89.3 R167.2 | length 7.1
  Top Layer w0.254: R167.2@238,5.5 BT89.3@238,12.6
NetBT89_4: BT89.4 Q89.3 | length 8.1
  Top Layer w0.254: BT89.4@238,16.4 Q89.3@238,24.45
NetBT90_3: BT90.3 R168.2 | length 7.1
  Top Layer w0.254: R168.2@260,5.5 BT90.3@260,12.6
NetBT90_4: BT90.4 Q90.3 | length 8.1
  Top Layer w0.254: BT90.4@260,16.4 Q90.3@260,24.45
NetBT91_3: BT91.3 R169.2 | length 7.1
  Top Layer w0.254: R169.2@283,5.5 BT91.3@283,12.6
NetBT91_4: BT91.4 Q91.3 | length 8.1
  Top Layer w0.254: BT91.4@283,16.4 Q91.3@283,24.45
NetC46_1: C46.1 C47.1 U14.2 | length 6.7
  Top Layer w0.254: C47.1@243.599,222.287 C46.1@246.227,222.287 246.352,222.287 246.902,222.837 U14.2@250.083,222.837
NetC46_2: C46.2 C47.2 R205.2 | length 5.1
  Top Layer w0.254: R205.2@241.117,223.737 C47.2@243.599,223.737 C46.2@246.227,223.737
NetC51_2: C51.2 R202.2 U14.1 | length 4.1
  Top Layer w0.203: U14.1@250.083,223.337 C51.2@250.083,225.877
  Top Layer w0.254: R202.2@248.483,225.877 C51.2@250.083,225.877
NetC53_1: C53.1 U14.9 | length 4.2
  Top Layer w0.203: U14.9@254.452,222.837 257.266,222.837 258.172,223.743 C53.1@258.172,223.835
NetC54_2: C54.2 R204.1 U14.7 | length 5.6
  Top Layer w0.203: U14.7@254.452,221.836 257.161,221.836 258.101,220.896 C54.2@258.226,220.896 R204.1@259.622,220.896
NetC55_1: C55.1 C56.1 C57.1 U14.4 | length 7.2
  Top Layer w0.254: C57.1@247.213,217.194 C55.1@248.599,217.194 ; C55.1@248.633,217.228 C55.1@248.633,217.353 C56.1@248.633,218.965 248.633,221.404 249.065,221.836 U14.4@250.083,221.836
NetC57_2: C57.2 R207.1 | length 1.4
  Top Layer w0.254: C57.2@247.214,215.743 R207.1@248.632,215.743
  Top Layer w0.635: C57.2@247.213,215.744 C57.2@247.214,215.743 ; R207.1@248.632,215.743 R207.1@248.633,215.741
NetC61_1: C61.1 D2.2 L2.1 U15.8
NetC61_2: C61.2 U15.1 | length 3.7
  Top Layer w0.254: C61.2@196.85,229.387 198.12,229.387 198.861,230.129 U15.1@198.861,231.501
NetC62_2: C62.2 R210.1 U15.6 | length 5.9
  Top Layer w0.254: R210.1@187.525,234.101 C62.2@189.049,234.101 U15.6@193.461,234.101
NetC70_2: C70.2 R210.2 | length 1.5
  Top Layer w0.254: C70.2@186.001,235.551 R210.2@187.525,235.551
NetC75_2: C75.2 C76.1 F1.1 U16.2 U16.4 | length 15.9
  Top Layer w0.635: C76.1@146.309,194.32 C75.2@148.794,194.32
  Top Layer w0.762: C76.1@146.309,194.32 C76.1@146.254,194.265 F1.1@146.254,191.719 146.373,191.6 146.723,191.6 148.546,189.776 148.577,189.776 148.946,189.408 U16.4@148.946,188.519
  Top Layer w1.27: U16.4@148.946,188.519 U16.2@155.245,188.519
NetC78_1: C78.1 Q93.3 Q95.3 R219.1 R220.2 | length 13.9
  Top Layer w0.25: R220.2@230.733,216.738 Q95.3@227.14,216.738 Q93.3@227.14,222.019 R219.1@230.791,222.019 C78.1@232.183,222.019
NetC79_2: C79.2 C80.2 U17.73 | length 5.8
  Top Layer w0.178: U17.73@122.33,209.775 123.999,209.775 124.595,210.371 C79.2@127.894,210.371
NetC88_2: C88.2 C89.2 U17.49 | length 5.7
  Top Layer w0.254: C88.2@120.105,191.389 C89.2@120.105,192.837 U17.49@120.105,197.05
NetD1_1: D1.1 L1.2 Q92.5 Q92.6 Q92.7 Q92.8 Q92.TAB
NetH1_3: H1.3 R197.2 | length 4.3
  Top Layer w0.254: H1.3@275.057,186.487 275.06,186.484 275.06,182.154 R197.2@275.063,182.151
NetH2_3: H2.3 R199.2 | length 4.3
  Top Layer w0.254: R199.2@251.308,182.151 H2.3@251.308,186.487
NetH3_3: H3.3 R200.2 | length 4.9
  Top Layer w0.254: R200.2@227.635,181.559 H3.3@227.635,186.487
NetQ92_1: Q92.1 Q92.2 Q92.3 R204.2 RSNS1.2 | length 5
  Top Layer w0.25: R204.2@261.072,220.896 262.781,220.896 264.426,222.541 264.426,223.279 RSNS1.2@264.566,223.42
NetQ92_4: Q92.4 R203.2 | length 13
  Top Layer w0.203: R203.2@259.622,222.337 260.818,222.337 v1(260.833,222.352) ; Q92.4@267.097,231.5 267.106,231.491 v1(267.106,229.794)
  Bottom Layer w0.203: v1(260.833,222.352) 267.106,228.625 v1(267.106,229.794)
NetQ93_1: Q93.1 R216.1 R218.2 | length 3.4
  Top Layer w0.25: R216.1@221.439,222.969 R218.2@223.025,222.969 Q93.1@224.84,222.969
NetQ94_1: Q94.1 R220.1 | length 17.4
  Top Layer w0.254: v1(229.692,231.267) 231.521,231.267 Q94.1@231.547,231.293 ; v1(232.181,218.008) v1(232.181,218.008) R220.1@232.183,216.738
  Bottom Layer w0.254: v1(229.692,231.267) 229.692,220.497 v1(232.181,218.008)
NetQ95_1: Q95.1 R221.1 R222.2 | length 3.7
  Top Layer w0.25: R222.2@223.025,215.788 R221.1@223.025,217.688 Q95.1@224.84,217.688
NetR201_2: R201.2 R202.1 | length 1.5
  Top Layer w0.254: R201.2@246.959,227.327 R202.1@248.483,227.327
NetR203_1: R203.1 U14.8 | length 3.7
  Top Layer w0.203: U14.8@254.452,222.337 R203.1@258.172,222.337
NetR211_2: R211.2 U15.4 | length 3.2
  Top Layer w0.254: U15.4@198.861,235.401 R211.2@198.861,238.568
NRST: R223.2 SW1.1 U17.14 | length 55.3
  Top Layer w0.178: v1(104.013,204.089) 104.094,204.17 104.276,204.17 104.381,204.275 U17.14@106.88,204.275
  Top Layer w0.254: SW1.1@120.006,239.27 R223.2@120.006,235.001 120.006,232.241 121.971,230.276 121.971,216.438 v1(121.945,216.413)
  Bottom Layer w0.254: v1(104.013,204.089) 104.013,212.573 105.486,214.046 120.65,214.046 121.945,215.341 v1(121.945,216.413)
PA0: U17.23
PA1: U17.24
PA2: H7.3 U17.25 | length 90.2
  Top Layer w0.178: U17.25@106.88,198.775 106.928,198.775 106.985,198.718 v1(106.985,193.818)
  Bottom Layer w0.254: v1(106.985,193.818) 111.115,189.687 134.95,189.687 140.487,195.224 140.487,217.184 130.277,227.395 H7.3@130.277,238.67
PA3: H7.2 U17.26 | length 85.9
  Top Layer w0.178: v1(108.56,193.818) 108.582,193.84 108.582,197.027 U17.26@108.605,197.05
  Bottom Layer w0.254: v1(108.56,193.818) 111.928,190.449 134.544,190.449 139.675,195.58 139.675,216.919 127.737,228.857 H7.2@127.737,238.67
PA9: M1.3 U17.68 | length 48.5
  Top Layer w0.178: U17.68@122.33,207.275 164.022,207.275 v1(165.1,206.197)
  Bottom Layer w0.178: v1(165.1,206.197) 166.593,206.197 M1.3@169.304,203.486
PA10: M1.4 U17.69 | length 47.6
  Top Layer w0.178: U17.69@122.33,207.775 164.843,207.775 166.764,205.854 M1.4@166.764,203.486
PB2: C41.1 H1.4 R196.1 U17.37 | length 214.5
  Top Layer w0.178: v1(113.259,195.605) 113.665,195.605 114.105,196.045 U17.37@114.105,197.05
  Top Layer w0.254: v1(191.338,185.771) 195.423,189.855 204.649,189.855 208.246,186.258 v1(214.884,186.258) ; H1.4@277.597,186.487 277.6,186.484 277.6,182.154 R196.1@277.603,182.151 C41.1@279.203,182.151
  Bottom Layer w0.254: v1(113.259,195.605) 111.825,197.039 103.418,197.039 98.552,192.173 98.552,188.384 101.166,185.771 v1(191.338,185.771) ; v1(214.884,186.258) 217.5,188.874 275.209,188.874 H1.4@277.597,186.487
PB3: U17.89
PB4: U17.90
PB5: U17.91
PB6: U17.92
PB7: U17.93
PB8: U17.95
PB9: U17.96
PB10: U17.47
PB11: U17.48
PB15: U17.54
PC8: U17.65
PC9: U17.66
PC13: U17.7
PC14: U17.8
PC15: U17.9
PD13: U17.60
PD14: U17.61
PD15: U17.62
PE8: C42.1 H2.4 R198.1 U17.39 | length 189.3
  Top Layer w0.178: v1(114.757,194.767) 114.757,194.873 115.105,195.221 U17.39@115.105,197.05
  Top Layer w0.254: v1(202.565,187.655) 202.59,187.655 210.312,179.934 235.966,179.934 244.094,188.062 252.273,188.062 H2.4@253.848,186.487 C42.1@253.848,182.151 R198.1@255.422,182.151
  Bottom Layer w0.254: v1(114.757,194.767) 114.74,194.767 114.435,194.462 111.43,194.462 110.378,195.515 104.049,195.515 100.076,191.541 100.076,189.016 101.462,187.63 202.54,187.63 v1(202.565,187.655)
PH0: C81.1 U17.12 X1.3 | length 9.1
  Top Layer w0.178: C81.1@100.203,205.275 U17.12@106.88,205.275
  Top Layer w0.254: X1.3@97.735,205.275 C81.1@100.203,205.275
PH1: C90.1 U17.13 X1.1 | length 13.6
  Top Layer w0.178: X1.1@94.035,203.075 94.21,203.075 95.31,204.175 100.106,204.175 C90.1@100.203,204.077 100.328,204.077 101.025,204.775 U17.13@106.88,204.775
V_MCU: C1.2 C2.2 C3.2 C4.2 C5.2 C6.2 C7.2 C8.2 C9.2 C10.2 C11.2 C12.2 C13.2 C14.1 C15.1 C16.1 C17.1 C18.1 C19.1 C20.1 C21.1 C22.1 C23.1 C24.1 C25.1 C26.1 R183.2 R184.2 R185.2 R186.2 R187.2 R188.2 R189.2 R190.2 R191.2 R192.2 R193.2 R194.2 R195.2 R196.2 R198.2 U1.10 U1.16 U2.10 U2.16 U3.10 U3.16 U4.10 U4.16 U5.10 U5.16 U6.10 U6.16 U7.10 U7.16 U8.10 U8.16 U9.10 U9.16 U10.10 U10.16 U11.10 U11.16 U12.10 U12.16 U13.10 U13.16 | length 858.4
  Top Layer w0.508: U1.16@20.385,172.699 20.385,176.103 20.391,176.11 ; U1.10@28.005,172.699 C1.2@28.005,176.11 ; R184.2@34.5,5.5 C15.1@34.5,3.894 34.5,2.132 ; U2.16@43.385,172.699 43.385,176.11 ; U2.10@51.005,172.699 C2.2@51.005,176.11 ; R185.2@56.5,5.5 C16.1@56.5,3.894 56.5,2.132 ; U3.16@65.385,172.699 65.385,176.11 ; U3.10@73.005,172.699 C3.2@73.005,176.11 ; R186.2@78.5,5.5 C17.1@78.5,3.894 78.5,2.132 ; U4.16@87.385,172.699 87.385,176.11 ; U4.10@95.005,172.699 C4.2@95.005,176.11 ; R187.2@100.5,5.5 C18.1@100.5,3.894 100.5,2.132 ; U5.16@109.385,172.699 109.385,176.11 ; U5.10@117.005,172.699 C5.2@117.005,176.11 ; R188.2@122.5,5.5 C19.1@122.5,3.894 122.5,2.132 ; U6.16@131.385,172.699 131.385,176.11 ; U6.10@139.005,172.699 C6.2@139.005,176.11 ; R189.2@144.5,5.5 C20.1@144.5,3.894 144.5,2.132 ; U7.16@153.385,172.699 153.385,176.11 ; U7.10@161.005,172.699 C7.2@161.005,176.11 ; R190.2@166.5,5.5 C21.1@166.5,3.894 166.5,2.132 ; U8.16@175.385,172.699 175.385,176.11 ; U8.10@183.005,172.699 C8.2@183.005,176.11 ; R191.2@188.5,5.5 C22.1@188.5,3.894 188.5,2.132 ; U9.16@197.385,172.699 197.385,176.11 ; U9.10@205.005,172.699 C9.2@205.005,176.11 ; R192.2@210.5,5.5 C23.1@210.5,3.894 210.5,2.132 ; U10.16@219.385,172.699 219.385,176.11 ; U10.10@227.005,172.699 C10.2@227.005,176.11 ; R193.2@232.5,5.5 C24.1@232.5,3.894 232.5,2.132 ; U11.16@241.385,172.699 241.385,176.11 ; U11.10@249.005,172.699 C11.2@249.005,176.11 ; R194.2@254.5,5.5 C25.1@254.5,3.894 254.5,2.132 ; R198.2@255.422,180.701 255.422,176.117 255.415,176.11 ; U13.16@263.385,172.699 263.385,176.11 ; U13.10@271.005,172.699 C12.2@271.005,176.11 ; R195.2@277.5,5.5 277.5,2.597 cw(c277.036,2.597) 277.036,2.132 254.5,2.132 ; R196.2@277.603,180.701 277.603,176.116 277.597,176.11 ; U12.16@286.385,172.699 286.385,175.387 ; U12.10@294.005,172.699 293.997,172.707 293.997,174.684 293.294,175.387 286.385,175.387 ; 20.391,176.11 C1.2@28.005,176.11 ; 20.391,176.11 14.192,176.11 10.566,172.484 10.566,6.436 R183.2@11.502,5.5 C14.1@11.502,3.894 11.502,2.617 ccw(c11.987,2.617) 11.987,2.132 34.5,2.132 ; C1.2@28.005,176.11 43.385,176.11 ; 34.5,2.132 56.5,2.132 ; 43.385,176.11 C2.2@51.005,176.11 ; C2.2@51.005,176.11 65.385,176.11 ; 56.5,2.132 78.5,2.132 ; 65.385,176.11 C3.2@73.005,176.11 ; C3.2@73.005,176.11 87.385,176.11 ; 78.5,2.132 100.5,2.132 ; 87.385,176.11 C4.2@95.005,176.11 ; C4.2@95.005,176.11 109.385,176.11 ; 100.5,2.132 122.5,2.132 ; 109.385,176.11 C5.2@117.005,176.11 ; C5.2@117.005,176.11 131.385,176.11 ; 122.5,2.132 144.5,2.132 ; 131.385,176.11 C6.2@139.005,176.11 ; C6.2@139.005,176.11 153.385,176.11 ; 144.5,2.132 166.5,2.132 ; 153.385,176.11 C7.2@161.005,176.11 ; C7.2@161.005,176.11 175.385,176.11 ; 166.5,2.132 188.5,2.132 ; 175.385,176.11 C8.2@183.005,176.11 ; C8.2@183.005,176.11 197.385,176.11 ; 188.5,2.132 210.5,2.132 ; 197.385,176.11 C9.2@205.005,176.11 ; C9.2@205.005,176.11 219.385,176.11 ; 210.5,2.132 232.5,2.132 ; 219.385,176.11 C10.2@227.005,176.11 ; C10.2@227.005,176.11 241.385,176.11 ; 232.5,2.132 254.5,2.132 ; 241.385,176.11 C11.2@249.005,176.11 ; C11.2@249.005,176.11 255.415,176.11 ; 255.415,176.11 263.385,176.11 ; 263.385,176.11 C12.2@271.005,176.11 ; C12.2@271.005,176.11 277.597,176.11 ; 277.597,176.11 C13.2@286.385,176.11 286.385,175.387